# Altium PCB STM32.PcbDoc (part 1 of 10)
Units mil, origin at the board's own origin, x right, y up, seen from the top; angles counter-clockwise.
Board outline 3925 x 3925 mil, 2 copper layers (Top Layer, Bottom Layer); 152 components, 142 nets, 670 pads, 189 vias.
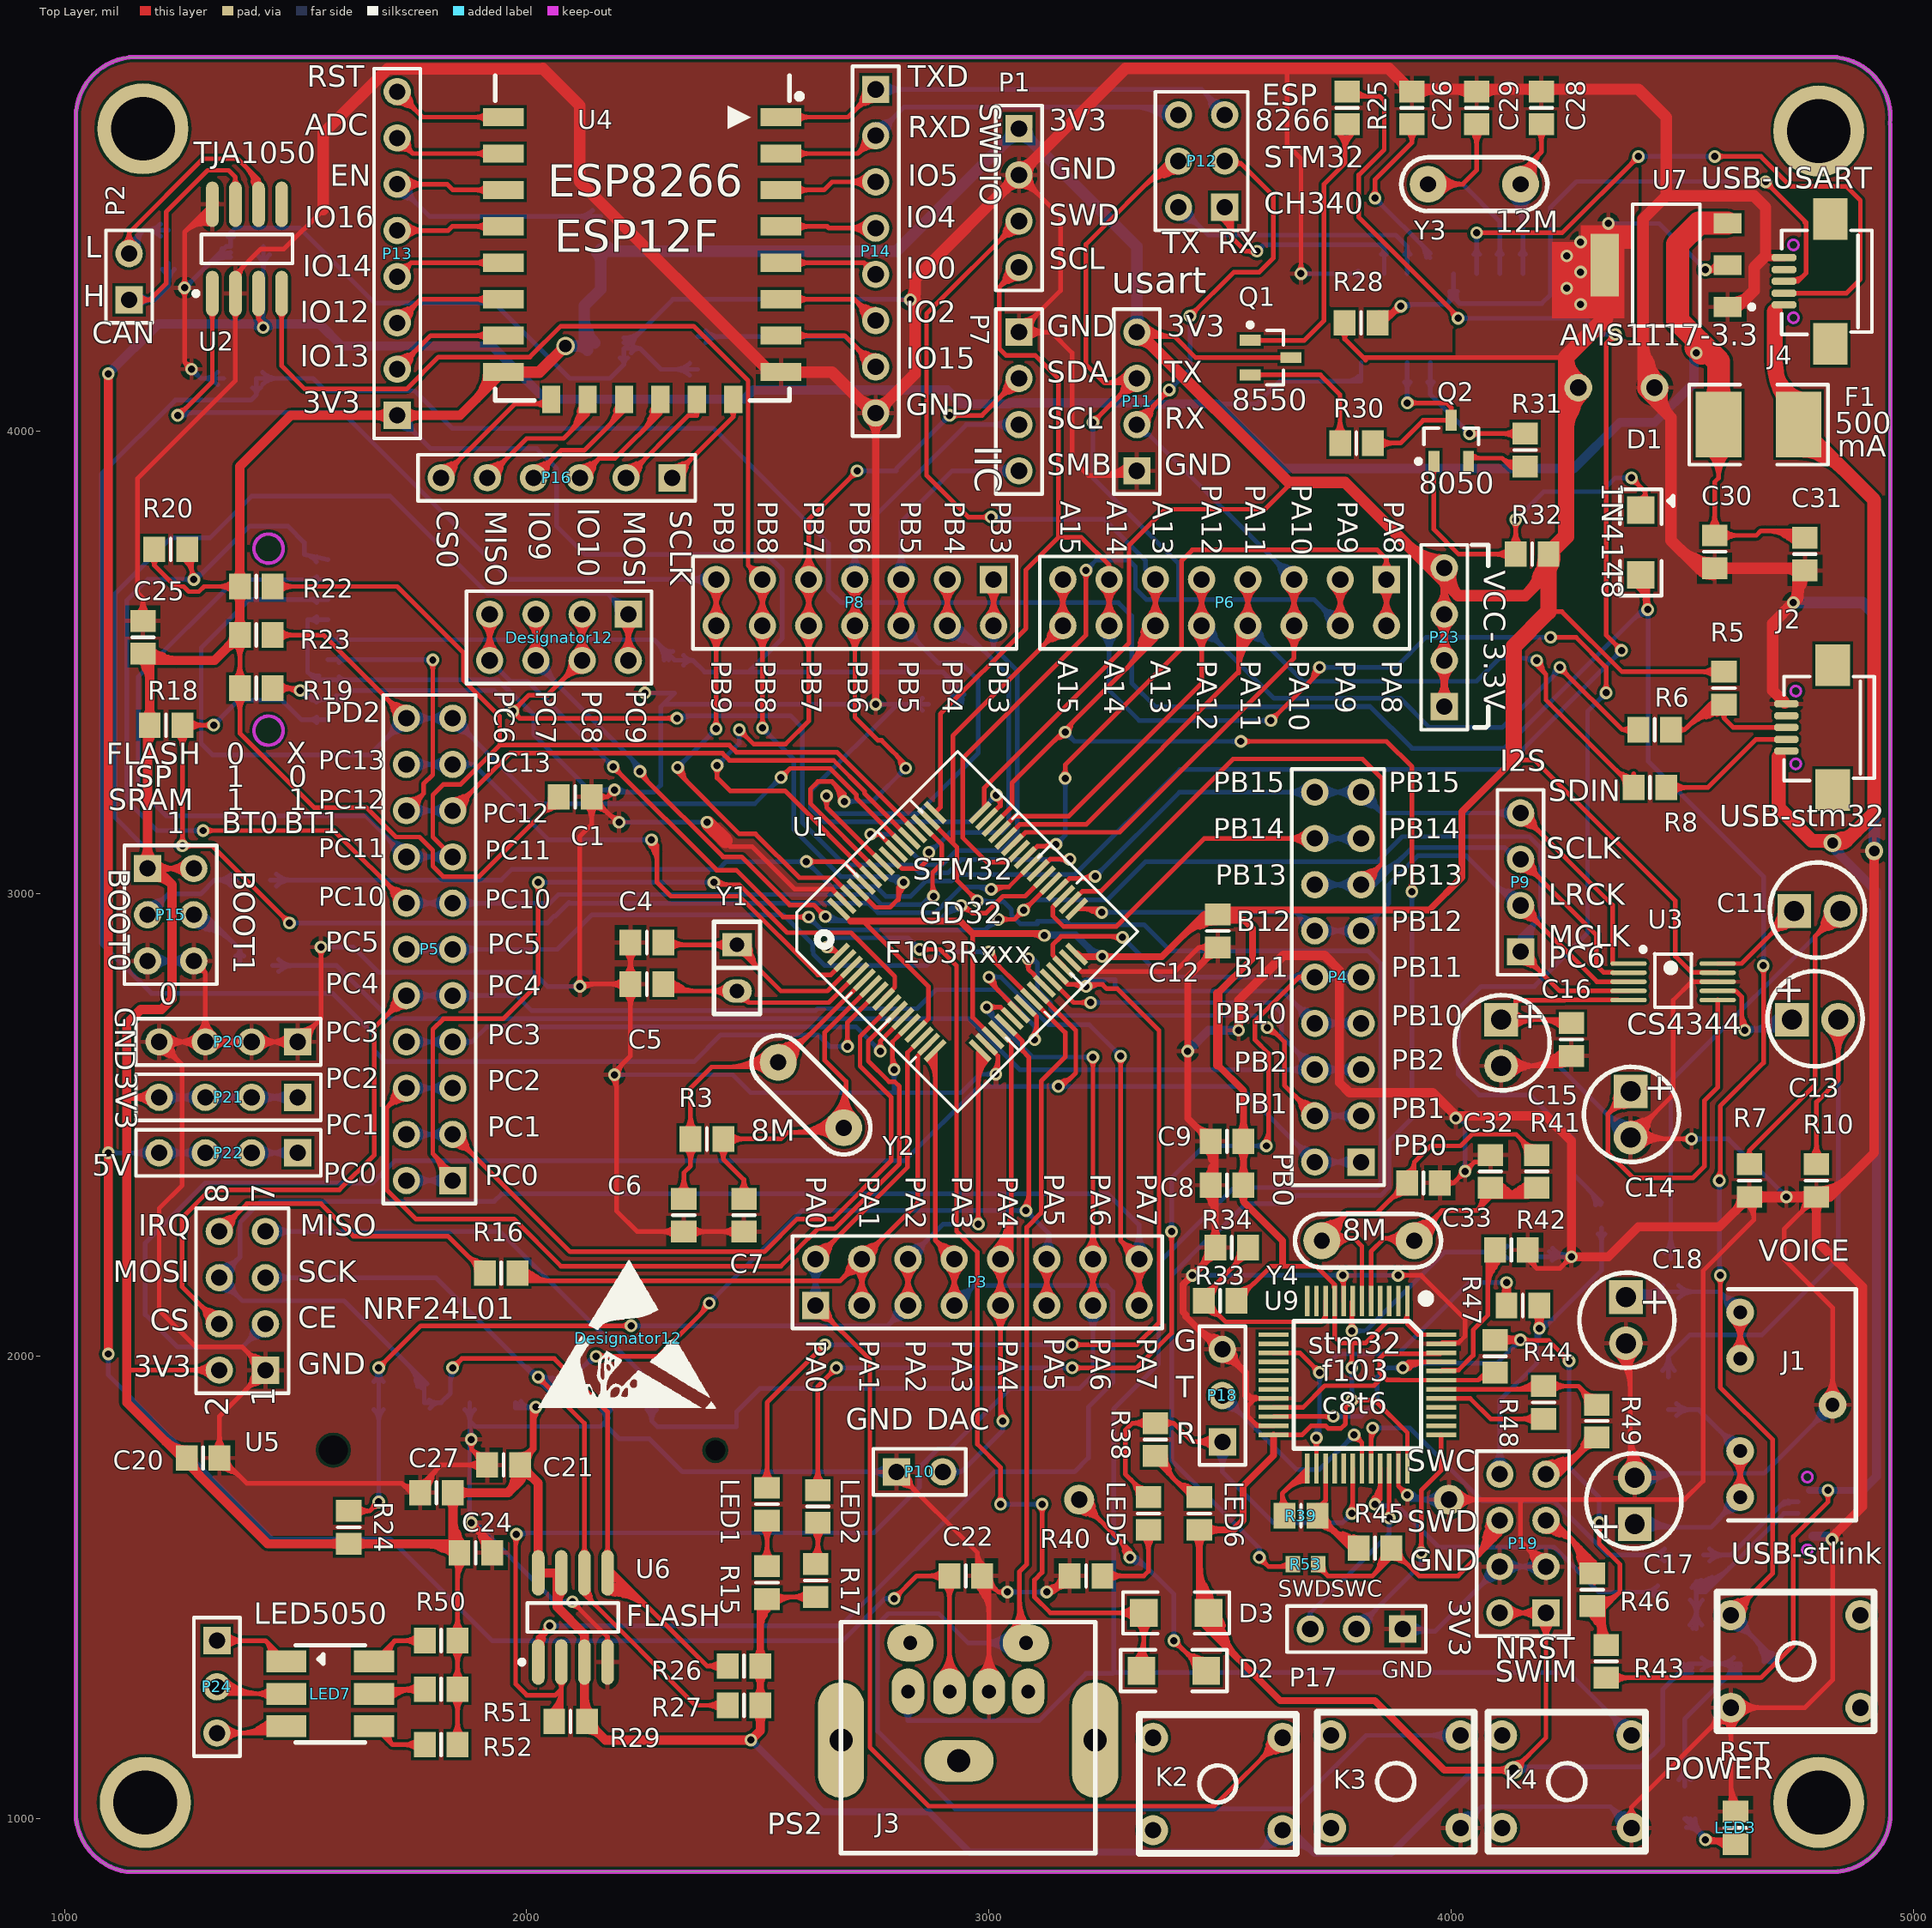
[diagram p0: Top Layer view]
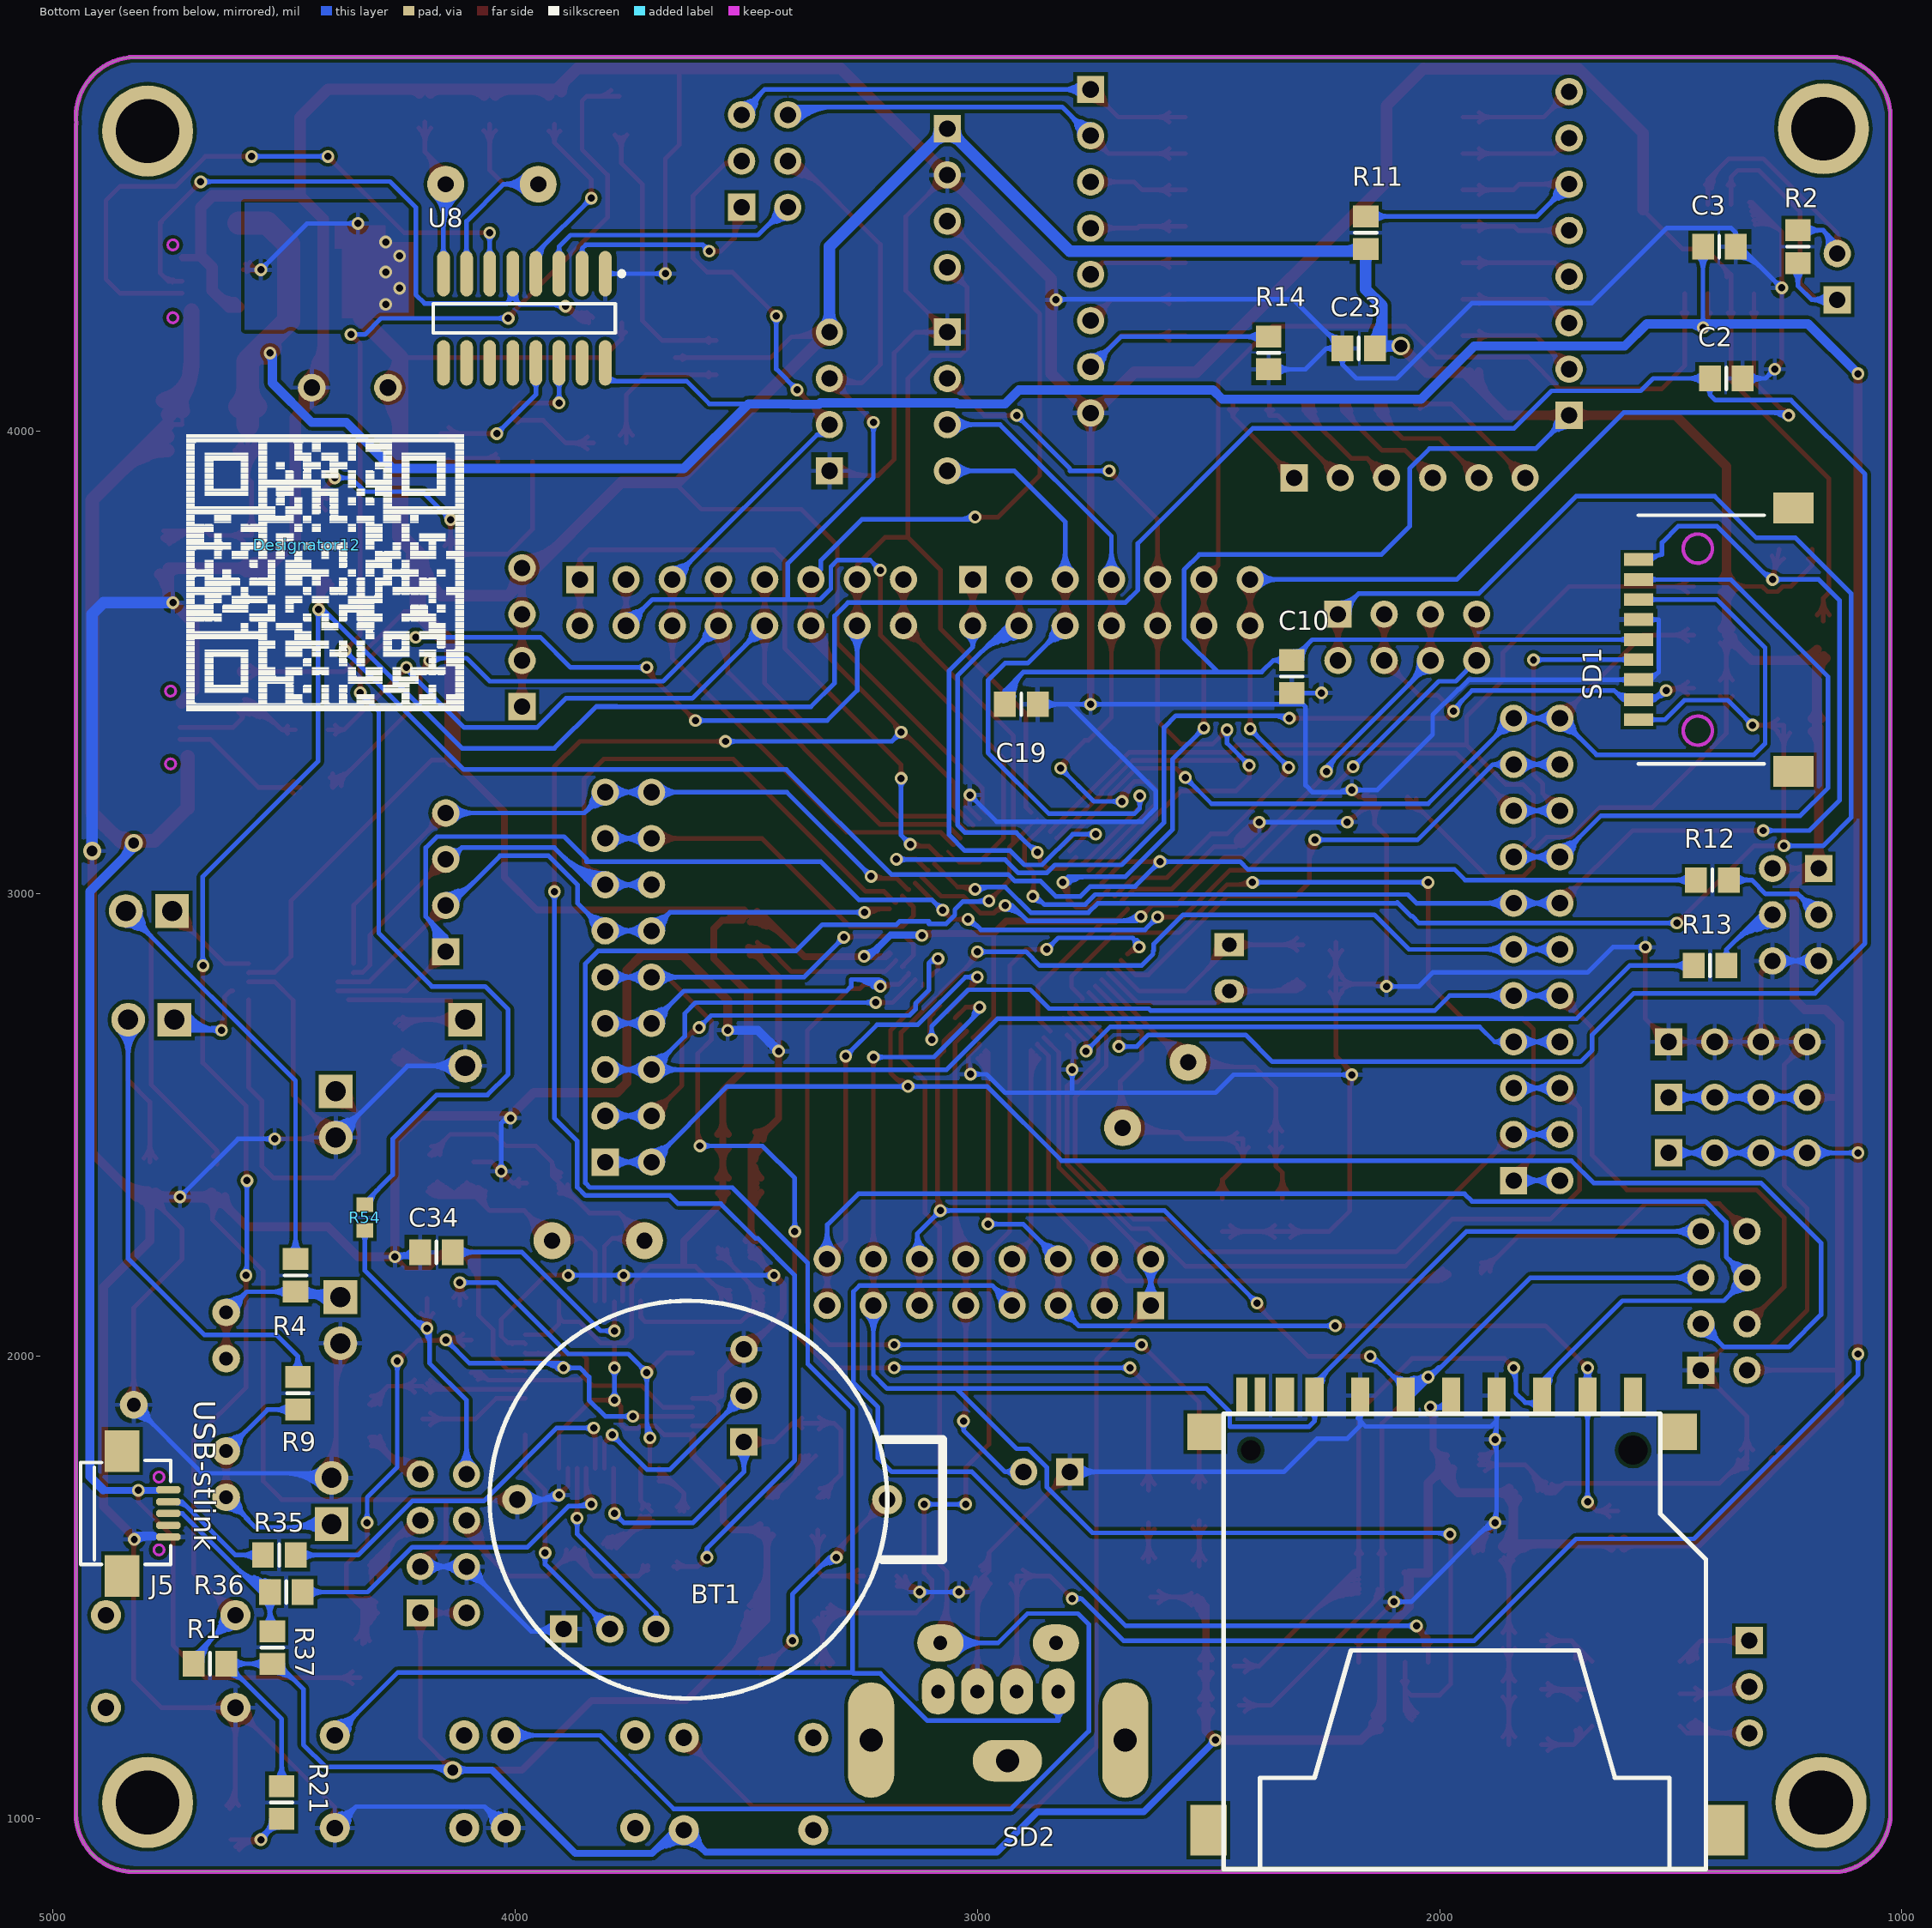
[diagram p1: Bottom Layer view, seen from below]

## Layer stack, top to bottom
Top Solder: solder mask 0.4, Solder Resist, Dk 3.5
Top Layer: signal copper 1.4
Dielectric 1: dielectric 12.6, FR-4, Dk 4.8
Bottom Layer: signal copper 1.4
Bottom Solder: solder mask 0.4, Solder Resist, Dk 3.5

## Board outline
1025.63,998.68 ccw(c1154.78,1013.49) 1135,885 4825,885 ccw(c4825,1010) 4950,1010 4950,4665 4949.14,4665.1 ccw(c4820,4680) 4834.9,4809.14 4834.9,4810 1140,4810 1140.1,4809.15 ccw(c1154.9,4680) 1025.76,4694.91 1025,4695

## Design rules (kind name [scope] priority, off if disabled: settings)
Clearance [All] p1: gap=6
PolygonConnect [All] p1: connectstyle=Relief reliefconductorwidth=10 reliefentries=4 polygonreliefangle="90 Angle" airgapwidth=10
RoutingVias [All] p1: holewidth=15.75 width=27.56 viastyle="Through Hole" minholewidth=11.81 minwidth=27.56 maxholewidth=28 maxwidth=50
SMDNeckDown [All] p1: percent=50.000
SolderMaskExpansion [All] p1: expansion=4
Width [All] p1: maxlimit=100 minlimit=6 preferedwidth=10
29 further rules are at their usual default settings.

## Classes and differential pairs
component class STLINK: C32 C33 J5 LED5 LED6 LED7 P17 P18 P19 P20 P21 P22 P23 P24 R33 R34 R35 R36 R37 R38 R39 R40 R41 R43 R44 R45 R46 R47 R48 R49 R50 R51 R52 R53 R54 U9 Y4
component class STM32: BT1 C1 C2 C3 C4 C5 C6 C7 C8 C9 C10 C11 C12 C13 C14 C15 C16 C17 C18 C19 C20 C21 C22 C23 C24 C25 C26 C27 C28 C29 C30 C31 D1 D2 D3 F1 J1 J2 J3 J4 K2 K3 K4 LED1 LED2 LED3 P1 P2 P3 P4 P5 P6 P7 P8 P10 P11 P13 P14 P15 P16 Q1 Q2 R1 R2 R3 R4 R5 R6 R7 R8 R9 R10 R11 R12 R13 R14 R15 R16 R17 R18 R19 R20 R21 R22 R23 R24 R25 R26 R27 R28 R29 R30 R31 R32 RST SD1 SD2 U1 U2 U3 U4 U5 U6 U7 U8 Y1 Y2 Y3

## Components (designator, comment, footprint, x,y, rotation, side; value= is the part's Value field where it differs from the comment)
BT1 "电池" 电池座 2590,950 r270 bottom locked
C1 "Cap" 6-0805_N 2105,3210 r0 top
C2 "Cap" 6-0805_N 1380,4115 r180 bottom
C3 "Cap" 6-0805_N 1395,4400 r0 bottom
C4 "Cap" 6-0805_N 2260,2895 r0 top
C5 "Cap" 6-0805_N 2260,2805 r0 top
C6 "Cap" 6-0805_N 2340,2305 r90 top
C7 "Cap" 6-0805_N 2470,2305 r90 top
C8 "Cap" 6-0805_N 3515,2370 r0 top
C9 "Cap" 6-0805_N 3515,2465 r0 top
C10 "Cap" 6-0805_N 2320,3470 r270 bottom
C11 "Cap Pol3" 极性电容 4800,2990 r0 top
C12 "Cap" 6-0805_N 3495,2920 r270 top
C13 "Cap Pol3" 极性电容 4795,2755 r0 top
C14 "Cap Pol3" 极性电容 4415,2515 r270 top
C15 "Cap Pol3" 极性电容 4135,2670 r270 top
C16 "Cap" 6-0805_N 4260,2685 r270 top
C17 "Cap Pol3" 极性电容 4370,1695 r90 top
C18 "Cap Pol3" 极性电容 4405,2070 r270 top
C19 "Cap" 6-0805_N 2905,3410 r180 bottom
C20 "Cap" 6-0805_N 1300,1780 r180 top
C21 "Cap" 6-0805_N 1950,1765 r180 top
C22 "Cap" 6-0805_N 2950,1525 r180 top
C23 "Cap" 6-0805_N 2175,4180 r0 bottom
C24 "Cap" 6-0805_N 1890,1575 r0 top
C25 "Cap" 6-0805_N 1170,3555 r90 top
C26 "Cap" 6-0805_N 3915,4700 r90 top
C27 "Cap" 6-0805_N 1805,1705 r180 top
C28 "Cap" 6-0805_N 4195,4700 r270 top
C29 "Cap" 6-0805_N 4055,4700 r270 top
C30 "Cap" 6-0805_N 4570,3740 r90 top
C31 "Cap" 6-0805_N 4765,3735 r90 top
C32 "Cap" 6-0805_N 4085,2400 r270 top
C33 "Cap" 6-0805_N 3940,2375 r180 top
C34 "Cap" 6-0805_N 4170,2225 r180 bottom
D1 "1N4148" 1206 4410,3760 r90 top
D2 "1N4148" 1206 3400,1320 r180 top
D3 "1N4148" 1206 3405,1445 r180 top
Designator12 "Comment" 二维码 4450,3755 r180 bottom
Designator12 "Comment" HDR2X4 2220,3605 r180 top
Designator12 "Comment" 静电图标 2220,2040 r0 top
F1 "500MA" 1812 4665,4015 r0 top
J1 "Component_1" 耳机座 4825,1895 r90 top
J2 "USB_M" "USB MICRO 2" 4825,3360 r90 top
J3 "PS/2" PS/2 2680,925 r90 top
J4 "USB_M" "USB MICRO 2" 4820,4325 r90 top
J5 "USB_M" "USB MICRO 2" 4850,1660 r270 bottom
K2 "按键" 按键 3495,1075 r270 top
K3 "按键" 按键 3880,1080 r270 top
K4 "按键" 按键 4250,1080 r270 top
LED1 "LED" 6-0805_N 2520,1680 r90 top
LED2 "LED" 6-0805_N 2630,1675 r90 top
LED3 "LED" 6-0805_N 4615,980 r90 top
LED5 "LED" 6-0805_N 3345,1660 r270 top (schematic designator D2)
LED6 "LED" 6-0805_N 3455,1660 r90 top (schematic designator D3)
LED7 "50550" led5050 1575,1270 r0 top
P1 "stlink" HDR1X4 3065,4655 r270 top
P2 "Header 2" HDR1X2 1140,4285 r90 top
P3 "Header 8X2" HDR2X8 2625,2110 r0 top
P4 "Header 9X2" HDR2X9 3805,2420 r90 top
P5 "Header 11X2" HDR2X11 1840,2380 r90 top
P6 "Header 8X2" HDR2X8 3860,3680 r180 top
P7 "I2C" HDR1X4 3065,4215 r270 top
P8 "Header 7X2" HDR2X7 3010,3680 r180 top
P9 "Header 4" HDR1X4 4150,2875 r90 top
P10 "DAC" HDR1X2 2800,1750 r0 top
P11 "串口" HDR1X4 3320,3915 r90 top
P12 "串口选择" HDR2X3 3510,4485 r90 top
P13 "Header 8" HDR1X8 1720,4035 r90 top
P14 "Header 8" HDR1X8 2755,4740 r270 top
P15 "boot选择" HDR2X3 1180,3055 r270 top
P16 "Header 6" HDR1X6 2315,3900 r180 top
P17 "ST-LINK" HDR1X3 3895,1410 r180 top
P18 "串口" HDR1X3 3505,1815 r90 top
P19 "Header 4X2" HDR2X4 4205,1445 r90 top
P20 "Header 4" HDR1X4 1505,2680 r180 top
P21 "Header 4" HDR1X4 1505,2560 r180 top
P22 "Header 4" HDR1X4 1505,2440 r180 top
P23 "Header 4" HDR1X4 3985,3405 r90 top (schematic designator P21)
P24 "Header 3" HDR1X3 1330,1385 r270 top
Q1 "8550" SOT-23B_N 3609.29,4160 r0 top
Q2 "8050" SOT-23B_N 4000,3980 r90 top
R1 "Res2" 6-0805_N 4660,1335 r0 bottom
R2 "Res2" 6-0805_N 1225,4400 r90 bottom
R3 "Res2" 6-0805_N 2390,2470 r0 top
R4 "Res2" 6-0805_N 4475,2175 r90 bottom
R5 "Res2" 6-0805_N 4590,3445 r270 top
R6 "Res2" 6-0805_N 4440,3355 r0 top
R7 "Res2" 6-0805_N 4645,2380 r90 top
R8 "Res2" 6-0805_N 4430,3230 r0 top
R9 "Res2" 6-0805_N 4470,1920 r270 bottom
R10 "Res2" 6-0805_N 4790,2380 r90 top
R11 "Res2" 6-0805_N 2160,4430 r90 bottom
R12 "Res2" 6-0805_N 1410,3030 r180 bottom
R13 "Res2" 6-0805_N 1415,2845 r0 bottom
R14 "Res2" 6-0805_N 2370,4170 r90 bottom
R15 "Res2" 6-0805_N 2520,1510.43 r90 top
R16 "Res2" 6-0805_N 1945,2180 r0 top
R17 "Res2" 6-0805_N 2625,1515 r90 top
R18 "Res2" 6-0805_N 1220,3365 r0 top
R19 "Res2" 6-0805_N 1415,3445 r0 top
R20 "Res2" 6-0805_N 1230,3745 r0 top
R21 "Res2" 6-0805_N 4505,1035 r270 bottom
R22 "Res2" 6-0805_N 1415,3665 r0 top
R23 "Res2" 6-0805_N 1415,3560 r0 top
R24 "Res2" 6-0805_N 1615,1630 r90 top
R25 "Res2" 6-0805_N 3775,4700 r90 top
R26 "Res2" 6-0805_N 2470,1330 r180 top
R27 "Res2" 6-0805_N 2470,1245 r180 top
R28 "Res2" 6-0805_N 3805,4235 r180 top
R29 "Res2" 6-0805_N 2095,1210 r180 top
R30 "Res2" 6-0805_N 3795,3975 r0 top
R31 "Res2" 6-0805_N 4160,3960 r90 top
R32 "Res2" 6-0805_N 4175,3735 r180 top
R33 "RES" 6-0805_N 3500,2120 r0 top
R34 "RES" 6-0805_N 3525,2235 r0 top
R35 "RES" 6-0805_N 4510,1570 r180 bottom
R36 "RES" 6-0805_N 4495,1490 r180 bottom
R37 "RES" 6-0805_N 4525,1370 r270 bottom
R38 "RES" 6-0805_N 3360,1820 r90 top
R39 "RES" 6-0805_N 3675,1655 r180 top
R40 "RES" 6-0805_N 3210,1525 r0 top
R41 "Res2" 6-0805_N 4185,2400 r90 top
R42 "RES" 6-0805_N 4130,2230 r180 top
R43 "RES" 6-0805_N 4335,1340 r90 top
R44 "RES" 6-0805_N 4095,2000 r90 top
R45 "RES" 6-0805_N 3835,1585 r180 top
R46 "RES" 6-0805_N 4305,1495 r270 top
R47 "RES" 6-0805_N 4155,2110 r180 top
R48 "RES" 6-0805_N 4200,1900 r90 top
R49 "RES" 6-0805_N 4315,1860 r90 top
R50 "RES" 6-0805_N 1815,1385 r180 top
R51 "RES" 6-0805_N 1815,1280 r180 top
R52 "RES" 6-0805_N 1815,1160 r180 top
R53 "RES" 1608[0603] 3685,1550 r0 top
R54 "RES" 1608[0603] 4325,2300 r270 bottom
RST "key" 按键 4745,1340 r90 top (schematic designator K1)
SD1 "PJS008-2000" TFCARD-M 1200,3550 r180 bottom
SD2 "PJS008-2000" SDCARD_A 1680,1915 r270 bottom
U1 "STM32F103RCT6" LQFP-64 2675,2870 r45 top
U2 "TJA1050T" SO8_M 1395,4395 r90 top
U3 "CS4344" TSSOP110_s 4480,2810 r0 top
U4 "Component_1" ESP_12_f 1935,4680 r0 top
U5 "NRF24l01" HDR2X4 1435,1970 r90 top
U6 "25Q32" SO8_M 2100,1435 r90 top
U7 "AMS117-3.3" ZZ311 4465,4360 r90 top
U8 "Component_1" SO-16_M 3980,4245 r270 bottom
U9 "STM32F103C8T6" LQFP48S 3905,2120 r270 top
Y1 "33.768K" SIP2 2455,2890 r270 top
Y2 "8M" 晶振 2615,2565 r315 top
Y3 "12M" 晶振 4050,4535 r180 top
Y4 "8M" 晶振 3820,2250 r180 top

## Footprints (in the part's own frame and the unit in brackets; to place one, negate y for a bottom-side part, rotate by r counter-clockwise, add the part's x,y. Pads: shape width x height; smd on the part's side, far side on the other; paste and mask are expansions set on the pad)
6-0805_N [mm] "Chip Resistor, Body 2.0x1.2mm, IPC Medium Density"
  rect 1.2x1.4 smd: 1(-0.9,0) 2(0.9,0)
  silkscreen extent 0,-0.6 0,0.6, body extent -1.07,-0.7 1.07,0.7, height 0.7
1206 [mil] "贴片元件"
  rect 60x60 smd: 1(-70,0) 2(70,0)
  silkscreen extent -115,-45 115,45, body extent -75,-35 75,35, height 39
1608[0603] [mm] "Chip Capacitor, Body 1.6x0.8mm, IPC High Density"
  rect 0.8x0.9 smd: 1(-0.7,0) 2(0.7,0)
  body extent -0.87,-0.48 0.87,0.48, height 1.3
1812 [mm] "保险丝"
  rect 2.5x3.6 smd: 1(-2.2,0) 2(2.2,0)
  silkscreen extent -3.81,-2.2 3.81,2.2, body extent -2.54,-1.65 2.67,1.65, height 1.2
ESP_12_f [mm] "ESP-12 Wi-Fi Module by AI-Thinker"
  rect 2.25x1 smd: 1(15.625,0) 2(15.625,-2) 3(15.625,-4) 4(15.625,-6) 5(15.625,-8) 6(15.625,-10) 7(15.625,-12) 8(15.625,-14) 15(0.375,-14) 16(0.375,-12) 17(0.375,-10) 18(0.375,-8) 19(0.375,-6) 20(0.375,-4) 21(0.375,-2) 22(0.375,0)
  rect 1x1.5 smd: 9(13,-15.5) 10(11,-15.5) 11(9,-15.5) 12(7,-15.5) 13(5,-15.5) 14(3,-15.5)
  silkscreen extent -0.08,-15.57 16.79,2.29
HDR1X2 [mm] "Connector; Header; 2 Position"
  rect 1.5x1.5 hole 0.9: 1(0,0)
  round 1.5 hole 0.9: 2(2.54,0)
  silkscreen extent -1.27,-1.27 3.81,1.27
HDR1X3 [mm] "Connector; Header; 3 Position"
  rect 1.5x1.5 hole 0.9: 1(0,0)
  round 1.5 hole 0.9: 2(2.54,0) 3(5.08,0)
  silkscreen extent -1.27,-1.27 6.35,1.27
HDR1X4 [mm] "Connector; Header; 4 Position"
  rect 1.5x1.5 hole 0.9: 1(0,0)
  round 1.5 hole 0.9: 2(2.54,0) 3(5.08,0) 4(7.62,0)
  silkscreen extent -1.27,-1.27 8.89,1.27
HDR1X6 [mm] "Connector; Header; 6 Position"
  rect 1.5x1.5 hole 0.9: 1(0,0)
  round 1.5 hole 0.9: 2(2.54,0) 3(5.08,0) 4(7.62,0) 5(10.16,0) 6(12.7,0)
  silkscreen extent -1.27,-1.27 13.97,1.27
HDR1X8 [mm] "Connector; Header; 8 Position"
  rect 1.5x1.5 hole 0.9: 1(0,0)
  round 1.5 hole 0.9: 2(2.54,0) 3(5.08,0) 4(7.62,0) 5(10.16,0) 6(12.7,0) 7(15.24,0) 8(17.78,0)
  silkscreen extent -1.27,-1.27 19.05,1.27
HDR2X3 [mm] "Connector; Header; 3x2 Position"
  rect 1.5x1.5 hole 0.9: 1(0,0)
  round 1.5 hole 0.9: 2(0,2.54) 3(2.54,0) 4(2.54,2.54) 5(5.08,0) 6(5.08,2.54)
  silkscreen extent -1.27,-1.27 6.35,3.81
HDR2X4 [mm] "Connector; Header; 4x2 Position"
  rect 1.5x1.5 hole 0.9: 1(0,0)
  round 1.5 hole 0.9: 2(0,2.54) 3(2.54,0) 4(2.54,2.54) 5(5.08,0) 6(5.08,2.54) 7(7.62,0) 8(7.62,2.54)
  silkscreen extent -1.27,-1.27 8.89,3.81
HDR2X7 [mm] "Connector; Header; 7x2 Position"
  rect 1.5x1.5 hole 0.9: 1(0,0)
  round 1.5 hole 0.9: 2(0,2.54) 3(2.54,0) 4(2.54,2.54) 5(5.08,0) 6(5.08,2.54) 7(7.62,0) 8(7.62,2.54) 9(10.16,0) 10(10.16,2.54) 11(12.7,0) 12(12.7,2.54) 13(15.24,0) 14(15.24,2.54)
  silkscreen extent -1.27,-1.27 16.51,3.81
HDR2X8 [mm] "Connector; Header; 8x2 Position"
  rect 1.5x1.5 hole 0.9: 1(0,0)
  round 1.5 hole 0.9: 2(0,2.54) 3(2.54,0) 4(2.54,2.54) 5(5.08,0) 6(5.08,2.54) 7(7.62,0) 8(7.62,2.54) 9(10.16,0) 10(10.16,2.54) 11(12.7,0) 12(12.7,2.54) 13(15.24,0) 14(15.24,2.54) 15(17.78,0) 16(17.78,2.54)
  silkscreen extent -1.27,-1.27 19.05,3.81
HDR2X9 [mm] "Connector; Header; 9x2 Position"
  rect 1.5x1.5 hole 0.9: 1(0,0)
  round 1.5 hole 0.9: 2(0,2.54) 3(2.54,0) 4(2.54,2.54) 5(5.08,0) 6(5.08,2.54) 7(7.62,0) 8(7.62,2.54) 9(10.16,0) 10(10.16,2.54) 11(12.7,0) 12(12.7,2.54) 13(15.24,0) 14(15.24,2.54) 15(17.78,0) 16(17.78,2.54) 17(20.32,0) 18(20.32,2.54)
  silkscreen extent -1.27,-1.27 21.59,3.81
HDR2X11 [mm] "Connector; Header; 11x2 Position"
  rect 1.5x1.5 hole 0.9: 1(0,0)
  round 1.5 hole 0.9: 2(0,2.54) 3(2.54,0) 4(2.54,2.54) 5(5.08,0) 6(5.08,2.54) 7(7.62,0) 8(7.62,2.54) 9(10.16,0) 10(10.16,2.54) 11(12.7,0) 12(12.7,2.54) 13(15.24,0) 14(15.24,2.54) 15(17.78,0) 16(17.78,2.54) 17(20.32,0) 18(20.32,2.54) 19(22.86,0) 20(22.86,2.54) 21(25.4,0) 22(25.4,2.54)
  silkscreen extent -1.27,-1.27 26.67,3.81
led5050 [mm]
  rect 2.2x1.2 smd: 1(-2.413,1.778) 2(-2.413,0) 3(-2.413,-1.778) 4(2.413,1.778) 5(2.413,0) 6(2.413,-1.778)
  silkscreen extent -1.91,-2.67 1.91,2.67
LQFP48S [mil] "DPIN-0.5"
  rect 65x10 smd: 1(0.42,0.29) 2(0.42,-19.39) 3(0.42,-39.08) 4(0.42,-58.76) 5(0.42,-78.45) 6(0.42,-98.13) 7(0.42,-117.82) 8(0.42,-137.5) 9(0.42,-157.19) 10(0.42,-176.87) 11(0.42,-196.56) 12(0.42,-216.24) 25(362.63,-216.24) 26(362.63,-196.56) 27(362.63,-176.87) 28(362.63,-157.19) 29(362.63,-137.5) 30(362.63,-117.82) 31(362.63,-98.13) 32(362.63,-78.45) 33(362.63,-58.76) 34(362.63,-39.08) 35(362.63,-19.39) 36(362.63,0.29)
  rect 10x65 smd: 13(73.26,-289.08) 14(92.94,-289.08) 15(112.63,-289.08) 16(132.31,-289.08) 17(152,-289.08) 18(171.68,-289.08) 19(191.37,-289.08) 20(211.05,-289.08) 21(230.74,-289.08) 22(250.42,-289.08) 23(270.11,-289.08) 24(289.79,-289.08) 37(289.79,73.13) 38(270.11,73.13) 39(250.42,73.13) 40(230.74,73.13) 41(211.05,73.13) 42(191.37,73.13) 43(171.68,73.13) 44(152,73.13) 45(132.31,73.13) 46(112.63,73.13) 47(92.94,73.13) 48(73.26,73.13)
  silkscreen extent -10,-246 319,46
LQFP-64 [mil]
  rect 60x12 smd: 1(0,0) 2(0,-19.69) 3(0,-39.37) 4(0,-59.05) 5(0,-78.74) 6(0,-98.43) 7(0,-118.11) 8(0,-137.8) 9(0,-157.48) 10(0,-177.17) 11(0,-196.85) 12(0,-216.54) 13(0,-236.22) 14(0,-255.9) 15(0,-275.59) 16(0,-295.28) 33(433.07,-295.28) 34(433.07,-275.59) 35(433.07,-255.91) 36(433.07,-236.22) 37(433.07,-216.54) 38(433.07,-196.85) 39(433.07,-177.17) 40(433.07,-157.48) 41(433.07,-137.8) 42(433.07,-118.11) 43(433.07,-98.43) 44(433.07,-78.74) 45(433.07,-59.06) 46(433.07,-39.37) 47(433.07,-19.69) 48(433.07,0)
  rect 12x60 smd: 17(68.9,-364.17) 18(88.58,-364.17) 19(108.27,-364.17) 20(127.95,-364.17) 21(147.64,-364.17) 22(167.32,-364.17) 23(187.01,-364.17) 24(206.69,-364.17) 25(226.38,-364.17) 26(246.06,-364.17) 27(265.75,-364.17) 28(285.43,-364.17) 29(305.12,-364.17) 30(324.81,-364.17) 31(344.49,-364.17) 32(364.17,-364.17) 49(364.17,68.89) 50(344.49,68.89) 51(324.8,68.9) 52(305.12,68.9) 53(285.44,68.9) 54(265.75,68.9) 55(246.06,68.9) 56(226.38,68.9) 57(206.69,68.9) 58(187.01,68.9) 59(167.32,68.9) 60(147.64,68.89) 61(127.95,68.9) 62(108.27,68.9) 63(88.58,68.9) 64(68.9,68.9)
  silkscreen extent -59,-423 492,128
PS/2 [mil]
  oval 80x100 hole 30: 1(455,-400) 6(455,-150)
  oval 100x70 hole 30: 2(350,-405) 3(350,-320) 4(350,-235) 5(350,-145)
  oval 90x150 hole 50: ""(200,-255)
  oval 250x100 hole 50: ""(245,0) ""(245,-550)
  silkscreen extent 0,-550 500,0
SDCARD_A [mm] "SD卡不自弹"
  rect 2x1 smd: 1(0,0) 2(0,-2.5) 3(0,-5) 4(0,-7.5) 5(0,-10) 6(0,-12.5) 7(0,-15) 8(0,-16.625) 9(0,2.5)
  rect 2x0.6 smd: 10(0,-19) 11(0,-18)
  rect 2x2 smd: 12(2,5) 13(2,-21)
  rect 2.8x2 smd: 14(23.876,-20.828) 15(23.876,7.62)
  round 1.5 hole 1.6: 16(3,2.5)
  round 1 hole 1.1: 17(3,-18.5)
  silkscreen extent 1,-20 26,6.5
SIP2 [mil]
  rect 50x64 hole 32: 1(0,0)
  oval 50x64 hole 32: 2(100,0)
  silkscreen extent -50,-50 150,50
SO8_M [mm] "SOIC, 8-Leads, Body 4.9x3.9mm, Pitch 1.27mm, IPC Low Density"
  oval 2.5x0.7 smd: 1(-2.45,1.905) 2(-2.45,0.635) 3(-2.45,-0.635) 4(-2.45,-1.905) 5(2.45,-1.905) 6(2.45,-0.635) 7(2.45,0.635) 8(2.45,1.905)
  silkscreen extent -2.57,-2.5 0.8,2.93, body extent -2,-2.5 2,2.5, height 1.75
SO-16_M [mm] "SOIC, 16-Leads, Body 9.9x3.9mm, Pitch 1.27mm, IPC Low Density"
  oval 2.5x0.7 smd: 1(-2.45,4.445) 2(-2.45,3.175) 3(-2.45,1.905) 4(-2.45,0.635) 5(-2.45,-0.635) 6(-2.45,-1.905) 7(-2.45,-3.175) 8(-2.45,-4.445) 9(2.45,-4.445) 10(2.45,-3.175) 11(2.45,-1.905) 12(2.45,-0.635) 13(2.45,0.635) 14(2.45,1.905) 15(2.45,3.175) 16(2.45,4.445)
  silkscreen extent -2.57,-5 0.8,5.47, body extent -2,-5 2,5, height 1.75
SOT-23B_N [mm] "SOT23, 3-Leads, Body 2.9x1.3mm, Pitch 0.95mm, Lead Span 2.4mm, IPC Medium Density"
  rect 1.15x0.6 smd: 1(-1.125,0.95) 2(-1.125,-0.95) 3(1.125,0)
  silkscreen extent -1.25,-1.5 0.7,1.92, body extent -0.7,-1.5 0.7,1.5, height 1.14
TFCARD-M [mm] "TF卡"
  rect 1.6x0.7 smd: 1(-9.398,3.3) 2(-9.398,2.2) 3(-9.398,1.1) 4(-9.398,0) 5(-9.398,-1.1) 6(-9.398,-2.2) 7(-9.398,-3.3) 8(-9.398,-4.4) 9(-9.398,4.4)
  rect 2.2x1.7 smd: 10(-0.88,-7.23) 11(-0.88,7.23)
  Keep-Out Layer circle w0.2: c-6.137,-5 r0.8
  Keep-Out Layer circle w0.2: c-6.137,5 r0.8
  silkscreen extent -9.4,-6.83 -2.5,6.83
TSSOP110_s [mm] "TSOP, 16-Leads, Body 5x4.4mm, Pitch 0.5mm, IPC Low Density"
  oval 2x0.25 smd: 1(-2.45,1) 2(-2.45,0.5) 3(-2.45,0) 4(-2.45,-0.5) 5(-2.45,-1) 6(2.45,-1) 7(2.45,-0.5) 8(2.45,0) 9(2.45,0.5) 10(2.45,1)
  silkscreen extent -1.78,-1.4 1.02,1.9, body extent -1.43,-1.65 1.43,1.53, height 1.1
"USB MICRO 2" [mm] "USB方孔"
  oct 0.4x1.35 smd: 1(-1.3,2.54) 2(-0.65,2.54) 3(0,2.54) 4(1.3,2.54) 5(0.65,2.54)
  rect 2.286x1.9 smd: 6(3.429,0) 7(-3.429,0)
  Keep-Out Layer circle w0.15: c2,2.023 r0.28
  Keep-Out Layer circle w0.15: c-2,2.023 r0.28
  silkscreen extent -2.92,-2.29 2.79,2.67
ZZ311 [mm] "SOT-223/SC-73; 4 Leads; Body 6.7 x 7.3 mm, inc. leads (LxW max)"
  rect 1.1x1.55 smd: 1(-2.3,-3.375) 2(0,-3.375) 3(2.3,-3.375)
  rect 3.45x1.55 smd: 4(0,3.375)
  silkscreen extent -3.35,-4.83 3.35,1.85
二维码 [mil]
  silkscreen extent -261,-360 339,238
按键 [mil]
  round 65.06 hole 35.43: 1(100,140) 2(-100,140) 3(-100,-140) 4(100,-140)
  silkscreen extent -150,-170 150,170
晶振 [mil]
  round 80 hole 35: 1(-100,0) 2(100,0)
  silkscreen extent -158,-58 158,58
极性电容 [mm]
  rect 1.85x1.85 hole 1.1: 1(-1.473,-0.686)
  round 1.85 hole 1.1: 2(1.067,-0.686)
  silkscreen extent -2.81,-3.25 2.41,1.98
电池座 [mil]
  round 65.06 hole 35.43 unplated: 1(-740,-605) 2(-740,-1405)
  silkscreen extent -1170,-1465 -310,-485
耳机座 [mil]
  round 60 hole 30: 1(0,0) 2(-200,200) 2(-100,200) 3(100,200) 3(200,200)
  silkscreen extent -250,-50 250,225
静电图标 [mil]
  silkscreen extent -195,-152 189,168

## Part data
C1 C2 C3 C4 C5 C6 C7 C8 C9 C10 C12 C16 C19 C20 C21 C22 C23 C24 C25 C26 C27 C28 C29 C30 C31 C32 C33: "Capacitor"
C11 C13 C14 C15 C17 C18: "Polarized Capacitor (Surface Mount)"
D1 D2 D3: library part "Diode 1N4148", "High Conductance Fast Diode"
F1: library part "Fuse 1", "Fuse"
LED1 LED2 LED3: library part 发光二极管
LED7: library part "Header 3X2A", "Header, 3-Pin, Dual row"
P1 P7 P11: library part "Header 4", "Header, 4-Pin"
P2: "Header, 2-Pin"
P3 P6: "Header, 8-Pin, Dual row"
P4: "Header, 9-Pin, Dual row"
P5: "Header, 11-Pin, Dual row"
P8: "Header, 7-Pin, Dual row"
P9 P20 P21 P22 P23: "Header, 4-Pin"
P10: library part "Header 2", "Header, 2-Pin"
P12 P15: library part "Header 3X2", "Header, 3-Pin, Dual row"
P13 P14: "Header, 8-Pin"
P16: "Header, 6-Pin"
P17 P18: library part "Header 3", "Header, 3-Pin"
P19: "Header, 4-Pin, Dual row"
P24: "Header, 3-Pin"
Q1: library part PNP, "PNP Bipolar Transistor"
Q2: library part NPN, "NPN Bipolar Transistor"
R1 R2 R3 R4 R5 R6 R7 R8 R9 R10 R11 R12 R13 R14 R15 R16 R17 R18 R19 R20 R21 R22 R23 R24 R25 R26 R27 R28 R29 R30 R31 R32 R41: "Resistor"
RST: library part 按键
SD1 SD2: library part SMS016AFA5E
U1: library part STM32F103RDT6, "ST High-density performance line ARM-based 32-bit MCU with 256 to  512KB Flash, USB, CAN, 11 timers, 3 ADCs, 13 communication interfaces"
U2 U3 U6: library part Component_1
U5: library part "Header 4X2", "Header, 4-Pin, Dual row"
U7: library part REG1117-3.3, "800mA and 1A Low Dropout Positive Regulator 2.85V, 3.3V, 5V, and Adjustable"
U9: "STM32 ARM-based 32-bit MCU with 64 Kbytes Flash, 48-pin LQFP, Industrial Temperature"
Y1 Y2 Y3 Y4: library part 晶振

## Free pads (board coordinates)
  round 196.85 hole 137.8 paste+0 mask+4: 0(1170,4655) 0(1175,1035) 0(4795,1035) 0(4795,4650)
  round 60 hole 35.43: 0(4275,4095) 0(4440,4095)

## Via types
v1: diameter 27.56, hole 15.75, Top Layer to Bottom Layer, tented both sides, 185 vias
v2: diameter 39.37, hole 23.62, Top Layer to Bottom Layer, tented both sides, 3 vias
v3: diameter 39.37, hole 27.56, Top Layer to Bottom Layer, tented both sides, 1 vias

## Nets (pads, with @x,y where several pads share a name; then routed paths per layer and width w, separated by ;. In a path a pad name is that pad's centre, name@x,y a point inside that pad or via, vN(x,y) a via of type N, cw(c..) or ccw(c..) an arc to the next point about the centre after c; other vN are vias at no path point)
5V: F1.2 J2.1 J4.1 J5.1 R43.1 | length 5082.9
  Top Layer w7.87: F1.2@4720,4015 F1.2@4720,4046.61
  Top Layer w10: R43.1@4335,1304.57 4669.57,1304.57 4740,1375 4740,1610 4815,1685 v1(4815,1710) ; F1.2@4720,4015 F1.2@4751.61,4015 ; v1@4808.79,1703.79 cw(c4793.8,1688.8) 4815,1688.8 cw(c4836.2,1688.8) v1@4821.21,1703.79 ; 4383.89,1304.57 ccw(c4383.89,1259.61) 4352.1,1291.4 cw(c4383.89,1259.61) 4383.89,1304.57 ; 4383.89,1304.57 cw(c4383.89,1349.53) 4352.1,1317.74 ccw(c4383.89,1349.53) 4383.89,1304.57
  Top Layer w30: 4708.18,3185 4708.18,3296.66 ; 4709.09,3185.91 4780,3115 4855,3115 ; F1.2@4751.61,4015 4915,3851.61 4915,3175 4855,3115 ; F1.2@4755.51,3994.95 ccw(c4839.2,4029.34) 4815.78,3941.94 ; v2@4829.06,3107.66 cw(c4852.23,3094.28) 4845.31,3120.13 ; 4801.62,3115 cw(c4801.62,3086.62) v2@4821.69,3106.69 ; 4801.62,3115 cw(c4801.62,3086.62) v2@4821.69,3106.69 ; 4801.62,3115 cw(c4801.62,3086.62) v2@4821.69,3106.69 ; v2@4828.31,3106.69 cw(c4848.38,3086.62) 4848.38,3115 ; v2@4828.31,3106.69 cw(c4848.38,3086.62) 4848.38,3115 ; v2@4828.31,3106.69 cw(c4848.38,3086.62) 4848.38,3115 ; 4855,3115 cw(c4840.72,3129.28) 4827.96,3113.63 ccw(c4840.72,3129.28) 4855,3115 ; F1.2@4751.61,3959.13 cw(c4751.61,3824.26) 4846.98,3919.63 ccw(c4751.61,3824.26) F1.2@4751.61,3959.13 ; F1.2@4751.61,3989.13 cw(c4751.61,3926.69) 4795.77,3970.84 ccw(c4751.61,3926.69) F1.2@4751.61,3989.13 ; v2@4825,3114.68 ccw(c4825,3186.35) 4875.68,3135.68 cw(c4825,3186.35) v2@4825,3114.68
  Top Layer w35: 4700,4260 4700,4155 ccw(c4866.39,4155) F1.2@4748.73,4037.34 ; 4708.88,4106.37 ccw(c4781.54,4148.32) F1.2@4759.82,4067.29 ; 4714.07,4097.39 cw(c4654.11,4062.78) F1.2@4720.98,4044.86
  Bottom Layer w10: v2@4825,3100 v2(4825,3110)
  Bottom Layer w15: J5.1@4775,1710 4892.36,1710 ; v1@4810.56,1705.56 ccw(c4799.84,1694.84) 4799.84,1710 ccw(c4799.84,1725.16) v1@4810.56,1714.44 ; v1@4819.44,1705.56 cw(c4830.16,1694.84) 4830.16,1710 cw(c4830.16,1725.16) v1@4819.44,1714.44
  Bottom Layer w20: v2@4825,3100 4920,3005 4920,1740 4891.18,1711.18 ; v2@4834.69,3110 ccw(c4882.21,3110) 4848.6,3076.4 cw(c4882.21,3110) v2@4834.69,3110
(NRS): P19.7 R49.1 | length 1712.3
  Top Layer w10: P19.7@4191.74,1752.98 cw(c4228.69,1730.74) 4218.98,1772.76 ; P19.7@4200.31,1747.82 cw(c4256.8,1713.83) 4241.96,1778.06 ; P19.7@4205,1745 4235.43,1745 ; P19.7@4208.88,1742.67 cw(c4284.91,1696.91) 4264.94,1783.37 ; P19.7@4209.08,1743.03 cw(c4253.23,1721.67) 4240.54,1769.05 ; P19.7@4217.26,1766.24 ccw(c4239.41,1804.59) 4250.87,1761.82 ; P19.7@4218.08,1738.67 cw(c4279.22,1709.1) 4261.64,1774.7 ; P19.7@4218.87,1740.69 cw(c4243.73,1732.96) 4236.99,1758.1 ; 4278.5,1795.46 cw(c4310,1781.51) R49.1@4310.85,1815.95 ; 4284.56,1809.13 cw(c4310.4,1797.69) R49.1@4311.1,1825.95 ; 4286.15,1801.1 cw(c4320.15,1792) R49.1@4310.69,1825.9 ; R49.1@4315,1824.57 4235.43,1745 ; 4235.43,1745 ccw(c4235.43,1738.39) 4228.97,1739.79 cw(c4235.43,1738.39) 4235.43,1745 ; 4235.43,1745 cw(c4235.43,1751.61) 4228.97,1750.21 ccw(c4235.43,1751.61) 4235.43,1745 ; 4266.78,1785.01 ccw(c4228.5,1837.48) R49.1@4292.66,1827.44 ; 4266.78,1785.01 ccw(c4228.5,1837.48) R49.1@4292.66,1827.44 ; 4266.78,1785.01 ccw(c4228.5,1837.48) R49.1@4292.66,1827.44 ; 4286.28,1799.24 ccw(c4262.23,1832.2) R49.1@4302.54,1825.9 ; 4286.28,1799.24 ccw(c4262.23,1832.2) R49.1@4302.54,1825.9 ; 4286.28,1799.24 ccw(c4262.23,1832.2) R49.1@4302.54,1825.9 ; R49.1@4289.61,1801.67 cw(c4304.33,1781.5) R49.1@4308.19,1806.17 ; R49.1@4289.61,1801.67 cw(c4304.33,1781.5) R49.1@4308.19,1806.17 ; R49.1@4289.61,1801.67 cw(c4304.33,1781.5) R49.1@4308.19,1806.17 ; P19.7@4205,1739.53 ccw(c4205,1799.79) 4247.61,1757.18 cw(c4205,1799.79) P19.7@4205,1739.53 ; P19.7@4205,1749.53 ccw(c4205,1833.93) 4264.68,1774.25 cw(c4205,1833.93) P19.7@4205,1749.53 ; P19.7@4205,1759.53 ccw(c4205,1868.07) 4281.75,1791.32 cw(c4205,1868.07) P19.7@4205,1759.53 ; P19.7@4205,1769.53 ccw(c4205,1902.21) 4298.82,1808.39 cw(c4205,1902.21) P19.7@4205,1769.53 ; 4276.49,1786.06 ccw(c4237.98,1824.57) 4292.44,1824.57 cw(c4237.98,1824.57) 4276.49,1786.06 ; 4285.99,1795.56 cw(c4311.06,1770.49) 4311.06,1805.95 ccw(c4311.06,1770.49) 4285.99,1795.56 ; R49.1@4293.56,1803.13 ccw(c4272.12,1824.57) 4302.44,1824.57 cw(c4272.12,1824.57) R49.1@4293.56,1803.13
(SWCLK): P19.8 R47.1 R54.2 | length 1680.3
  Top Layer w10: v1(4190.43,2060.43) R47.1@4190.43,2110 R47.1@4190.43,2125 ; v1@4182.83,2064.82 ccw(c4163.96,2075.72) 4185.01,2081.36 ; v1@4182.83,2064.82 ccw(c4163.96,2075.72) 4185.01,2081.36 ; v1@4182.83,2064.82 ccw(c4163.96,2075.72) 4185.01,2081.36 ; 4185.22,2080.55 ccw(c4205.12,2085.88) v1@4194.82,2068.04 ; 4185.22,2080.55 ccw(c4205.12,2085.88) v1@4194.82,2068.04 ; 4185.22,2080.55 ccw(c4205.12,2085.88) v1@4194.82,2068.04 ; v1@4186.04,2068.04 ccw(c4175.74,2085.88) 4195.64,2080.55 ; v1@4186.04,2068.04 ccw(c4175.74,2085.88) 4195.64,2080.55 ; v1@4186.04,2068.04 ccw(c4175.74,2085.88) 4195.64,2080.55 ; v1@4190.43,2061.11 ccw(c4145.48,2061.11) 4177.27,2092.9 cw(c4145.48,2061.11) v1@4190.43,2061.11 ; v1@4190.43,2061.11 cw(c4235.39,2061.11) 4203.6,2092.9 ccw(c4235.39,2061.11) v1@4190.43,2061.11 ; 4190.43,2081.63 ccw(c4211.63,2081.63) 4196.64,2066.64 cw(c4211.63,2081.63) 4190.43,2081.63 ; 4190.43,2081.63 cw(c4169.24,2081.63) 4184.23,2066.64 ccw(c4169.24,2081.63) 4190.43,2081.63 ; 4195.86,2081.36 ccw(c4216.91,2075.72) v1@4198.04,2064.82 ; 4195.86,2081.36 ccw(c4216.91,2075.72) v1@4198.04,2064.82 ; 4195.86,2081.36 ccw(c4216.91,2075.72) v1@4198.04,2064.82
  Bottom Layer w10: P19.8@4105,1745 4105,1905 4185,1985 4185,2055 v1(4190.43,2060.43) 4200.43,2060.43 4325,2185 R54.2@4325,2277.44 ; v1@4185.75,2053.01 cw(c4180.85,2045.24) 4188.8,2040.65 ; v1@4189.36,2061.02 cw(c4211.07,2049.11) 4204.66,2073.03 ; 4105,1780.07 ccw(c4140.07,1780.07) 4115.27,1755.27 cw(c4140.07,1780.07) 4105,1780.07 ; 4105,1780.07 cw(c4069.93,1780.07) 4094.73,1755.27 ccw(c4069.93,1780.07) 4105,1780.07 ; 4105,1804.21 ccw(c4164.21,1804.21) 4122.34,1762.34 cw(c4164.21,1804.21) 4105,1804.21 ; 4105,1804.21 cw(c4045.79,1804.21) 4087.66,1762.34 ccw(c4045.79,1804.21) 4105,1804.21 ; 4325,2246.49 ccw(c4299.05,2246.49) 4317.4,2264.84 cw(c4299.05,2246.49) 4325,2246.49 ; 4325,2246.49 cw(c4350.95,2246.49) 4332.6,2264.84 ccw(c4350.95,2246.49) 4325,2246.49 ; 4185,2026.12 cw(c4224.75,2026.12) 4196.64,2054.23 ccw(c4224.75,2026.12) 4185,2026.12 ; v1@4190.43,2059.21 ccw(c4190.43,2080.41) 4205.42,2065.42 cw(c4190.43,2080.41) v1@4190.43,2059.21 ; v1@4190.43,2069.21 ccw(c4190.43,2114.55) 4222.49,2082.49 cw(c4190.43,2114.55) v1@4190.43,2069.21
(SWDIO): P19.6 R45.1 R53.2 | length 2153.4
  Top Layer w10: R53.2@3712.32,1547.32 cw(c3704.93,1525.19) 3727.57,1530.86 ; R53.2@3712.56,1545 3732.56,1525 ; 3844.71,1549.58 cw(c3893.14,1538.4) R45.1@3869.79,1582.28 ; R45.1@3854.64,1571.19 cw(c3840.63,1562.43) R45.1@3856.73,1558.72 ; 3855.69,1554.21 cw(c3880.52,1548.48) R45.1@3872.98,1572.83 ; R45.1@3869.11,1580.69 ccw(c3903,1590.15) 3893.9,1556.15 ; 4066.59,1585.38 cw(c4152.44,1565.39) P19.6@4107.32,1641.11 ; 4071.92,1608.27 cw(c4135.74,1593.4) P19.6@4102.2,1649.7 ; 4075.4,1588.75 cw(c4140.16,1571.39) P19.6@4111.26,1631.89 ; 4077.25,1631.16 cw(c4119.05,1621.42) P19.6@4097.08,1658.29 ; 4081.02,1609.71 cw(c4127.85,1597.17) P19.6@4106.95,1640.91 ; P19.6@4083.76,1632.74 cw(c4045.41,1610.59) 4088.18,1599.13 ; 4091.99,1613.35 cw(c4116.52,1606.78) P19.6@4109.19,1631.09 ; P19.6@4105,1645 4105,1615 ; 3732.56,1525 cw(c3754.9,1547.35) 3723.31,1547.86 ccw(c3754.9,1547.35) 3732.56,1525 ; 3732.56,1525 3830,1525 ; 3830,1525 ccw(c3777.21,1577.79) 3851.82,1580.41 cw(c3777.21,1577.79) 3830,1525 ; 3830,1525 3870.43,1565.43 R45.1@3870.43,1585 3930.43,1525 4015,1525 4105,1615 ; 4105,1615 ccw(c4098.92,1615) 4100.13,1620.96 cw(c4098.92,1615) 4105,1615 ; 4105,1615 cw(c4111.08,1615) 4109.87,1620.96 ccw(c4111.08,1615) 4105,1615 ; R53.2@3712.56,1537.28 cw(c3712.56,1518.65) 3725.73,1531.83 ccw(c3712.56,1518.65) R53.2@3712.56,1537.28 ; 3846.26,1541.26 ccw(c3808.63,1578.89) 3861.82,1580.76 cw(c3808.63,1578.89) 3846.26,1541.26 ; R45.1@3862.52,1557.52 ccw(c3840.04,1580) 3871.81,1581.11 cw(c3840.04,1580) R45.1@3862.52,1557.52 ; R45.1@3870.43,1562.44 cw(c3870.43,1507.98) 3908.94,1546.49 ccw(c3870.43,1507.98) R45.1@3870.43,1562.44 ; R45.1@3870.43,1572.44 cw(c3870.43,1542.12) 3891.87,1563.56 ccw(c3870.43,1542.12) R45.1@3870.43,1572.44 ; R45.1@3889.06,1581.06 ccw(c3924.51,1581.06) 3899.44,1555.99 cw(c3924.51,1581.06) R45.1@3889.06,1581.06 ; 4041.92,1551.92 ccw(c3948.83,1645) 4080.47,1645 cw(c3948.83,1645) 4041.92,1551.92 ; 4058.99,1568.99 ccw(c3982.97,1645) 4090.47,1645 cw(c3982.97,1645) 4058.99,1568.99 ; 4076.06,1586.06 ccw(c4017.12,1645) 4100.47,1645 cw(c4017.12,1645) 4076.06,1586.06 ; 4093.13,1603.13 ccw(c4051.26,1645) 4110.47,1645 cw(c4051.26,1645) 4093.13,1603.13
(SWIM): P19.5 R46.1 | length 1615.2
  Top Layer w10: P19.5@4199.94,1642.92 ccw(c4247.76,1662.53) 4234.39,1612.6 ; P19.5@4204.64,1650.46 cw(c4206.48,1622.42) 4233.63,1629.69 ; P19.5@4205,1645 4220.43,1645 4310,1555.43 ; P19.5@4209.19,1646.72 ccw(c4271.24,1672.15) 4253.88,1607.37 ; P19.5@4209.39,1646.1 ccw(c4239.98,1653.74) 4231.82,1623.29 ; 4274.68,1566.27 ccw(c4332.16,1578.72) R46.1@4300.32,1529.28 ; R46.1@4279.79,1542.68 ccw(c4313.67,1550.02) R46.1@4294.9,1520.87 ; 4282.43,1567.81 ccw(c4330,1580.55) R46.1@4305.37,1537.9 ; R46.1@4284.94,1539.74 ccw(c4270.63,1548.01) R46.1@4286.59,1552.28 ; R46.1@4286.88,1542.5 ccw(c4265.86,1560.37) 4292.51,1567.51 ccw(c4323.26,1575.75) R46.1@4309.25,1547.16 ; R46.1@4304.57,1548.54 ccw(c4302.91,1555.43) 4310,1555.43 ; R46.1@4304.57,1548.54 ccw(c4302.91,1555.43) 4310,1555.43 ; R46.1@4304.57,1548.54 ccw(c4302.91,1555.43) 4310,1555.43 ; R46.1@4304.57,1548.54 ccw(c4302.91,1555.43) 4310,1555.43 ; 4310,1555.43 ccw(c4317.95,1555.43) R46.1@4315.26,1547.95 ; 4310,1555.43 ccw(c4317.95,1555.43) R46.1@4315.26,1547.95 ; 4310,1555.43 ccw(c4317.95,1555.43) R46.1@4315.26,1547.95 ; 4310,1555.43 ccw(c4317.95,1555.43) R46.1@4315.26,1547.95 ; 4310,1555.43 4310,1510 4310,1555.43 ; P19.5@4205,1620.47 cw(c4205,1524) 4273.22,1592.22 ccw(c4205,1524) P19.5@4205,1620.47 ; P19.5@4205,1630.47 cw(c4205,1558.14) 4256.15,1609.29 ccw(c4205,1558.14) P19.5@4205,1630.47 ; P19.5@4205,1640.47 cw(c4205,1592.28) 4239.08,1626.36 ccw(c4205,1592.28) P19.5@4205,1640.47 ; P19.5@4229.53,1645 ccw(c4251.48,1645) 4235.96,1629.48 cw(c4251.48,1645) P19.5@4229.53,1645 ; 4245.28,1620.16 cw(c4155.55,1530.43) 4282.44,1530.43 ccw(c4155.55,1530.43) 4245.28,1620.16 ; 4262.35,1603.09 cw(c4189.69,1530.43) 4292.44,1530.43 ccw(c4189.69,1530.43) 4262.35,1603.09 ; 4279.42,1586.02 cw(c4223.84,1530.43) 4302.44,1530.43 ccw(c4223.84,1530.43) 4279.42,1586.02 ; 4296.49,1568.94 cw(c4257.98,1530.43) 4312.44,1530.43 ccw(c4257.98,1530.43) 4296.49,1568.94
BOOT0: R12.1 R25.2 U1.60 | length 5562.5
  Top Layer w10: v1(2605,3070) 2683.79,3070 U1.60@2730.68,3023.11 ; v1@2611.21,3063.79 cw(c2626.2,3048.8) 2626.2,3070 cw(c2626.2,3091.2) v1@2611.21,3076.21 ; R25.2@3775,4725 3844.57,4725 ; R25.2@3792.1,4738.6 ccw(c3824.94,4771.44) 3824.94,4725 ; 3844.57,4725.43 3855,4715 3855,4610 3800,4555 3800,4463 4005,4258 ; 4003.36,4255.68 ccw(c4019.86,4260.1) v1@4014.63,4243.84 ; v1(4015,4245) 4005,4255 ; v1@4346.22,4210 cw(c4325.02,4210) 4340.01,4195.01 cw(c4355,4180.02) v1@4355,4201.22 ; v1(4355,4210) 4335,4190 4335,3560 v1@4370,3525 ; v1@4359.72,3526.5 ccw(c4338.53,3526.5) 4353.52,3541.48 ccw(c4368.5,3556.47) v1@4368.5,3535.28 ; 4005,4255 ccw(c4009.95,4259.95) 4012.19,4253.32 cw(c4009.95,4259.95) 4005,4255 ; 4005,4255 cw(c4000.05,4250.05) 4006.68,4247.81 ccw(c4000.05,4250.05) 4005,4255 ; 4005,4255 4005,4258 ; 4005,4258 cw(c3998.78,4251.78) 4006.9,4248.38 ccw(c3998.78,4251.78) 4005,4258 ; 4005.13,4257.87 ccw(c4015,4267.73) v1@4015,4253.78 ; 4005.13,4257.87 ccw(c4015,4267.73) v1@4015,4253.78 ; 4005.13,4257.87 ccw(c4015,4267.73) v1@4015,4253.78 ; 4005.13,4257.87 ccw(c4015,4267.73) v1@4015,4253.78 ; 3997.89,4265.11 cw(c3977.78,4245) 4006.22,4245 ccw(c3977.78,4245) 3997.89,4265.11
  Bottom Layer w10: R12.1@1445.43,3030 1945,3030 1968,3053 2415,3053 2432,3070 v1(2605,3070) 2658.85,3016.15 2755.68,3016.15 2777.44,2994.38 2829.96,2994.38 2863.36,3027.78 2918.86,3027.78 2933.22,3042.14 3186.14,3042.14 3413,3269 4111.01,3269 v1(4368.5,3526.5) ; R12.1@1458.6,3016.83 cw(c1490.39,2985.04) 1490.39,3030 cw(c1490.39,3074.96) R12.1@1458.6,3043.17 ; v1@2598.79,3063.79 ccw(c2583.8,3048.8) 2583.8,3070 ccw(c2583.8,3091.2) v1@2598.79,3076.21 ; v1@2605,3061.22 cw(c2605,3040.02) 2619.99,3055.01 cw(c2634.98,3070) v1@2613.78,3070 ; v1(4015,4245) 4290,4245 4325,4210 v1(4355,4210) ; v1@4021.21,4238.79 cw(c4036.2,4223.8) 4036.2,4245 cw(c4036.2,4266.2) v1@4021.21,4251.21 ; v1@4359.72,3526.5 cw(c4338.53,3526.5) 4353.52,3511.51 cw(c4368.5,3496.52) v1@4368.5,3517.72
BOOT1: P4.5 P4.6 R13.2 U1.28 | length 4672.2
  Top Layer w10: U1.28@3134.34,2814.32 3183.66,2765 v1(3220,2765) ; 3198.8,2765 ccw(c3198.8,2786.2) 3213.79,2771.21 cw(c3198.8,2786.2) 3198.8,2765 ; 3198.8,2765 cw(c3198.8,2743.8) 3213.79,2758.79 ccw(c3198.8,2743.8) 3198.8,2765
  Bottom Layer w10: R13.2@1450.43,2845 1589,2845 1704,2730 2956.77,2730 3066.77,2620 P4.6@3705,2620 ; v1(3220,2765) 3609.45,2765 3609.72,2764.72 3632.84,2741.61 3632.84,2692.16 P4.6@3705,2620 ; 3674.48,2642.35 ccw(c3711.61,2652.3) P4.6@3703.9,2614.64 ; 3682.65,2650.52 cw(c3672.7,2613.39) P4.6@3710.36,2621.1 ; P4.5@3805,2620 P4.6@3705,2620 ; 1495.39,2845 ccw(c1495.39,2800.04) 1463.6,2831.83 cw(c1495.39,2800.04) 1495.39,2845 ; 1495.39,2845 cw(c1495.39,2889.96) 1463.6,2858.17 ccw(c1495.39,2889.96) 1495.39,2845 ; 3241.2,2765 ccw(c3241.2,2743.8) 3226.21,2758.79 cw(c3241.2,2743.8) 3241.2,2765 ; 3241.2,2765 cw(c3241.2,2786.2) 3226.21,2771.21 ccw(c3241.2,2786.2) 3241.2,2765 ; 3645.79,2620 ccw(c3645.79,2679.21) 3687.66,2637.34 cw(c3645.79,2679.21) 3645.79,2620 ; 3645.79,2620 cw(c3645.79,2560.79) 3687.66,2602.66 ccw(c3645.79,2560.79) 3645.79,2620 ; 3663.13,2661.87 ccw(c3705,2703.74) 3705,2644.53 cw(c3705,2703.74) 3663.13,2661.87 ; 3663.13,2661.87 cw(c3621.26,2620) 3680.47,2620 ccw(c3621.26,2620) 3663.13,2661.87 ; 3669.93,2620 ccw(c3669.93,2655.07) 3694.73,2630.27 cw(c3669.93,2655.07) 3669.93,2620 ; 3669.93,2620 cw(c3669.93,2584.93) 3694.73,2609.73 ccw(c3669.93,2584.93) 3669.93,2620 ; 3680.2,2644.8 ccw(c3705,2669.6) 3705,2634.53 cw(c3705,2669.6) 3680.2,2644.8 ; 3680.2,2644.8 cw(c3655.4,2620) 3690.47,2620 ccw(c3655.4,2620) 3680.2,2644.8 ; 3740.07,2620 ccw(c3740.07,2584.93) 3715.27,2609.73 cw(c3740.07,2584.93) 3740.07,2620 ; 3740.07,2620 cw(c3740.07,2655.07) 3715.27,2630.27 ccw(c3740.07,2655.07) 3740.07,2620 ; 3745.79,2620 ccw(c3745.79,2679.21) 3787.66,2637.34 cw(c3745.79,2679.21) 3745.79,2620 ; 3745.79,2620 cw(c3745.79,2560.79) 3787.66,2602.66 ccw(c3745.79,2560.79) 3745.79,2620 ; 3764.21,2620 ccw(c3764.21,2560.79) 3722.34,2602.66 cw(c3764.21,2560.79) 3764.21,2620 ; 3764.21,2620 cw(c3764.21,2679.21) 3722.34,2637.34 ccw(c3764.21,2679.21) 3764.21,2620 ; 3769.93,2620 ccw(c3769.93,2655.07) 3794.73,2630.27 cw(c3769.93,2655.07) 3769.93,2620 ; 3769.93,2620 cw(c3769.93,2584.93) 3794.73,2609.73 ccw(c3769.93,2584.93) 3769.93,2620
ERX: P12.5 P14.1 U4.1 | length 2153.7
  Top Layer w10: U4.1@2550.16,4680 2695,4680 P14.1@2755,4740 ; 2724.48,4717.65 cw(c2761.61,4707.7) P14.1@2753.9,4745.36 ; 2732.65,4709.48 ccw(c2722.7,4746.61) P14.1@2760.36,4738.9 ; 2610.22,4680 ccw(c2610.22,4644.55) 2585.15,4669.62 cw(c2610.22,4644.55) 2610.22,4680 ; 2610.22,4680 cw(c2610.22,4715.45) 2585.15,4690.38 ccw(c2610.22,4715.45) 2610.22,4680 ; 2713.13,4698.13 ccw(c2671.26,4740) 2730.47,4740 cw(c2671.26,4740) 2713.13,4698.13 ; 2713.13,4698.13 cw(c2755,4656.26) 2755,4715.47 ccw(c2755,4656.26) 2713.13,4698.13 ; P14.1@2730.2,4715.2 ccw(c2705.4,4740) 2740.47,4740 cw(c2705.4,4740) P14.1@2730.2,4715.2 ; P14.1@2730.2,4715.2 cw(c2755,4690.4) 2755,4725.47 ccw(c2755,4690.4) P14.1@2730.2,4715.2
  Bottom Layer w10: P14.1@2755,4740 3460,4740 P12.5@3520,4680 ; 3478.87,4709.63 ccw(c3519.84,4720.6) P12.5@3508.54,4679.73 ; 3489.93,4714.9 cw(c3480.93,4681.32) P12.5@3515.43,4685.69 ; 2790.07,4740 ccw(c2790.07,4704.93) 2765.27,4729.73 cw(c2790.07,4704.93) 2790.07,4740 ; 2790.07,4740 cw(c2790.07,4775.07) 2765.27,4750.27 ccw(c2790.07,4775.07) 2790.07,4740 ; 2814.21,4740 ccw(c2814.21,4680.79) 2772.34,4722.66 cw(c2814.21,4680.79) 2814.21,4740 ; 2814.21,4740 cw(c2814.21,4799.21) 2772.34,4757.34 ccw(c2814.21,4799.21) 2814.21,4740 ; 3464.59,4735.41 cw(c3414.19,4685) 3485.47,4685 ccw(c3414.19,4685) 3464.59,4735.41 ; 3476.66,4723.34 ccw(c3510,4756.67) 3510,4709.53 cw(c3510,4756.67) 3476.66,4723.34 ; 3481.66,4718.34 cw(c3448.33,4685) 3495.47,4685 ccw(c3448.33,4685) 3481.66,4718.34
ETX: P12.6 P14.2 U4.2 | length 2358.9
  Top Layer w10: U4.2@2550.16,4601.26 2716.26,4601.26 ; 2725.17,4612.99 cw(c2767.88,4604.09) P14.2@2753.15,4645.15 ; 2727.99,4610.17 ccw(c2719.09,4652.88) P14.2@2760.15,4638.15 ; P14.2@2755,4640 2716.26,4601.26 ; 2610.22,4601.26 ccw(c2610.22,4565.81) 2585.15,4590.88 cw(c2610.22,4565.81) 2610.22,4601.26 ; 2610.22,4601.26 cw(c2610.22,4636.71) 2585.15,4611.64 ccw(c2610.22,4636.71) 2610.22,4601.26 ; 2716.26,4601.26 ccw(c2681.67,4635.85) 2730.51,4638.61 cw(c2681.67,4635.85) 2716.26,4601.26 ; 2716.26,4601.26 cw(c2750.85,4566.67) 2753.61,4615.51 ccw(c2750.85,4566.67) 2716.26,4601.26 ; 2732.06,4617.06 ccw(c2711.57,4637.54) 2740.5,4639.18 cw(c2711.57,4637.54) 2732.06,4617.06 ; 2732.06,4617.06 cw(c2752.54,4596.57) 2754.18,4625.5 ccw(c2752.54,4596.57) 2732.06,4617.06
  Bottom Layer w10: P14.2@2749.64,4641.1 cw(c2787.3,4633.39) 2777.35,4670.52 ; P14.2@2755,4640 2817,4702 3398,4702 P12.6@3420,4680 ; P14.2@2756.1,4634.64 ccw(c2748.39,4672.3) 2785.52,4662.35 ; 3365,4694.78 ccw(c3374.85,4711.83) P12.6@3390.5,4699.88 ; 3374.85,4689.09 ccw(c3383.97,4704.87) P12.6@3398.45,4693.81 ; P12.6@3385.47,4685.35 ccw(c3370.66,4685.55) 3378.07,4698.39 ccw(c3383.23,4707.34) P12.6@3391.17,4700.72 ; 2779.8,4664.8 ccw(c2804.6,4640) 2769.53,4640 cw(c2804.6,4640) 2779.8,4664.8 ; 2779.8,4664.8 cw(c2755,4689.6) 2755,4654.53 ccw(c2755,4689.6) 2779.8,4664.8 ; 2796.87,4681.87 ccw(c2838.74,4640) 2779.53,4640 cw(c2838.74,4640) 2796.87,4681.87 ; 2796.87,4681.87 cw(c2755,4723.74) 2755,4664.53 ccw(c2755,4723.74) 2796.87,4681.87 ; 3309.74,4702 cw(c3309.74,4584.74) 3392.66,4667.66 ccw(c3309.74,4584.74) 3309.74,4702 ; 3333.89,4702 cw(c3333.89,4608.89) 3399.73,4674.73 ccw(c3333.89,4608.89) 3333.89,4702 ; 3358.03,4702 cw(c3358.03,4633.03) 3406.8,4681.8 ccw(c3358.03,4633.03) 3358.03,4702 ; 3382.17,4702 cw(c3382.17,4657.17) 3413.87,4688.87 ccw(c3382.17,4657.17) 3382.17,4702
FCS: P3.7 P3.8 U1.16 U6.1 | length 4763.6
  Top Layer w10: U6.1@2021.16,1381.87 ccw(c2016.43,1391.59) 2027.01,1389.38 ccw(c2035.08,1387.7) U6.1@2030.2,1381.05 ; U6.1@2025,1338.54 2025,1392 ; U6.1@2025.67,1372.96 ccw(c2011.42,1394.71) 2036.88,1389.4 ; 2038.53,1400.59 ccw(c2033.84,1408.71) v1@2042.19,1412.99 ; 2038.77,1407.85 cw(c2052.64,1404.13) v1@2049.76,1418.2 ; 2040.85,1405.77 ccw(c2037.13,1419.64) v1@2051.2,1416.76 ; U1.16@2883.79,2661.21 2883.79,2251.21 ; 2894.64,2233.09 ccw(c2932.52,2242.78) P3.8@2923.78,2204.67 ; 2901.91,2240.36 cw(c2892.22,2202.48) P3.8@2930.33,2211.22 ; P3.7@2925,2110 P3.8@2925,2210 2883.79,2251.21 ; 2025,1392 ccw(c2039.1,1392) 2030.41,1380.89 cw(c2039.1,1392) 2025,1392 ; 2025,1392 cw(c2010.89,1392) 2019.59,1380.89 ccw(c2010.89,1392) 2025,1392 ; 2025,1392 v1(2050,1417) ; 2035.01,1402.01 ccw(c2020.02,1417) 2041.22,1417 cw(c2020.02,1417) 2035.01,1402.01 ; 2035.01,1402.01 cw(c2050,1387.02) 2050,1408.22 ccw(c2050,1387.02) 2035.01,1402.01 ; 2039.4,1398.65 ccw(c2021.05,1409.24) v1@2041.52,1414.73 ; 2039.4,1398.64 cw(c2057.76,1388.04) v1@2052.27,1408.52 ; 2039.4,1398.65 ccw(c2021.05,1409.24) v1@2041.52,1414.73 ; 2039.4,1398.64 cw(c2057.76,1388.04) v1@2052.27,1408.52 ; 2039.4,1398.65 ccw(c2021.05,1409.24) v1@2041.52,1414.73 ; 2039.4,1398.64 cw(c2057.76,1388.04) v1@2052.27,1408.52 ; v1(2050,1417) ccw(c2089.4,1377.59) 2033.76,1374.47 cw(c2089.4,1377.59) v1(2050,1417) ; 2883.79,2251.21 ccw(c2924.07,2291.48) 2924.72,2234.53 cw(c2924.07,2291.48) 2883.79,2251.21 ; 2883.79,2251.21 cw(c2843.52,2210.93) 2900.47,2210.28 ccw(c2843.52,2210.93) 2883.79,2251.21 ; 2900.59,2234.41 ccw(c2924.45,2258.26) 2924.83,2224.53 cw(c2924.45,2258.26) 2900.59,2234.41 ; 2900.59,2234.41 cw(c2876.74,2210.55) 2910.47,2210.17 ccw(c2876.74,2210.55) 2900.59,2234.41 ; 2925,2145.07 ccw(c2960.07,2145.07) 2935.27,2120.27 cw(c2960.07,2145.07) 2925,2145.07 ; 2925,2145.07 cw(c2889.93,2145.07) 2914.73,2120.27 ccw(c2889.93,2145.07) 2925,2145.07 ; 2925,2150.79 ccw(c2865.79,2150.79) 2907.66,2192.66 cw(c2865.79,2150.79) 2925,2150.79 ; 2925,2150.79 cw(c2984.21,2150.79) 2942.34,2192.66 ccw(c2984.21,2150.79) 2925,2150.79 ; 2925,2169.21 ccw(c2984.21,2169.21) 2942.34,2127.34 cw(c2984.21,2169.21) 2925,2169.21 ; 2925,2169.21 cw(c2865.79,2169.21) 2907.66,2127.34 ccw(c2865.79,2169.21) 2925,2169.21 ; 2925,2174.93 ccw(c2889.93,2174.93) 2914.73,2199.73 cw(c2889.93,2174.93) 2925,2174.93 ; 2925,2174.93 cw(c2960.07,2174.93) 2935.27,2199.73 ccw(c2960.07,2174.93) 2925,2174.93 ; U6.1@2023.78,1373.91 cw(c2059.48,1375.91) 2034.2,1401.2 ccw(c2059.48,1375.91) U6.1@2023.78,1373.91 ; U1.16@2866.11,2643.53 cw(c2823.44,2600.85) 2883.79,2600.85 ccw(c2823.44,2600.85) U1.16@2866.11,2643.53 ; U1.16@2873.19,2650.6 cw(c2847.58,2624.99) 2883.79,2624.99 ccw(c2847.58,2624.99) U1.16@2873.19,2650.6 ; U1.16@2880.26,2657.67 cw(c2871.72,2649.14) 2883.79,2649.14 ccw(c2871.72,2649.14) U1.16@2880.26,2657.67
  Bottom Layer w10: v1(2050,1417) 2679,1417 3012,1750 3185,1750 3215,1780 3215,1890 3268,1943 3268,2140 3255,2153 2968,2153 P3.7@2925,2110 ; P3.7@2919.64,2111.1 cw(c2957.3,2103.39) 2947.35,2140.52 ; P3.7@2926.1,2104.64 ccw(c2918.39,2142.3) 2955.52,2132.35 ; 2071.2,1417 ccw(c2071.2,1395.8) 2056.21,1410.79 cw(c2071.2,1395.8) 2071.2,1417 ; 2071.2,1417 cw(c2071.2,1438.2) 2056.21,1423.21 ccw(c2071.2,1438.2) 2071.2,1417 ; 2949.8,2134.8 ccw(c2974.6,2110) 2939.53,2110 cw(c2974.6,2110) 2949.8,2134.8 ; 2949.8,2134.8 cw(c2925,2159.6) 2925,2124.53 ccw(c2925,2159.6) 2949.8,2134.8 ; 2966.87,2151.87 ccw(c3008.74,2110) 2949.53,2110 cw(c3008.74,2110) 2966.87,2151.87 ; 2966.87,2151.87 cw(c2925,2193.74) 2925,2134.53 ccw(c2925,2193.74) 2966.87,2151.87